# Allegro board SAFEBOX.brd
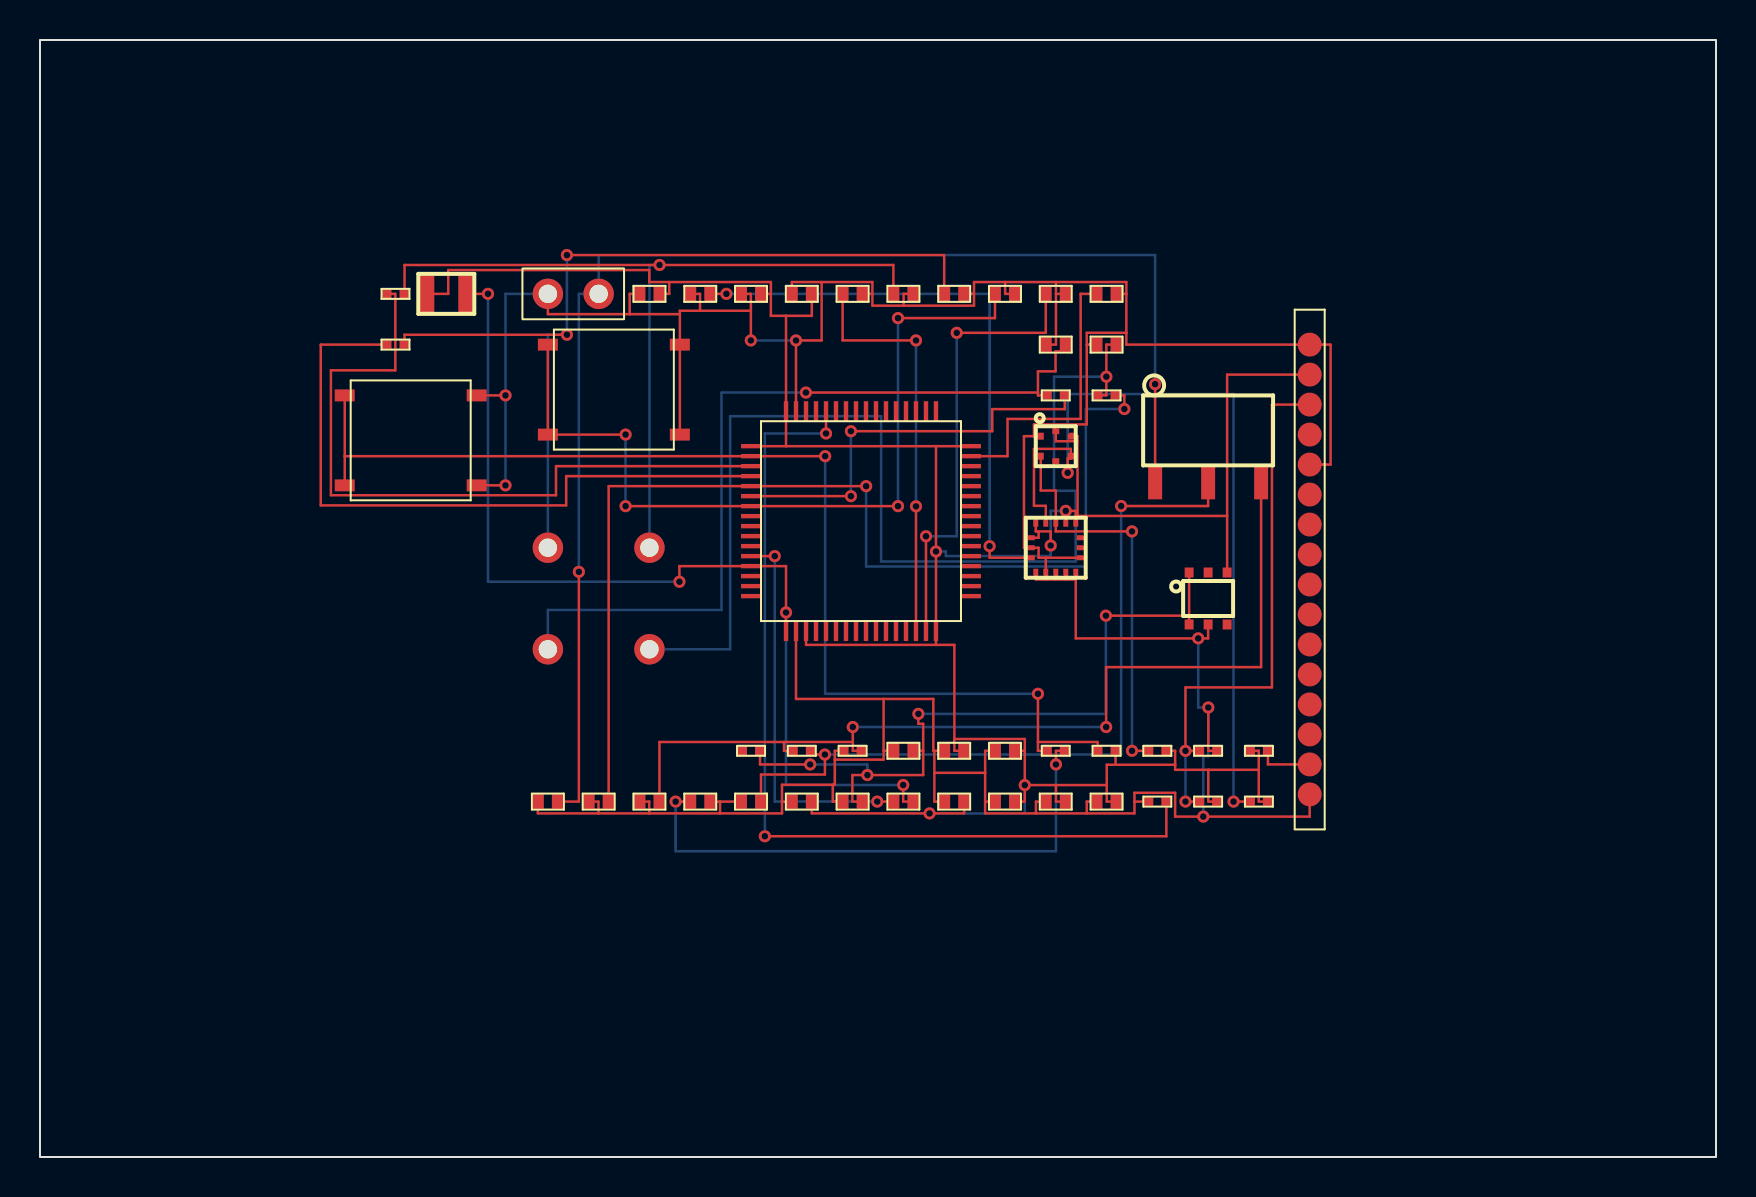
[diagram p0: board, top side]
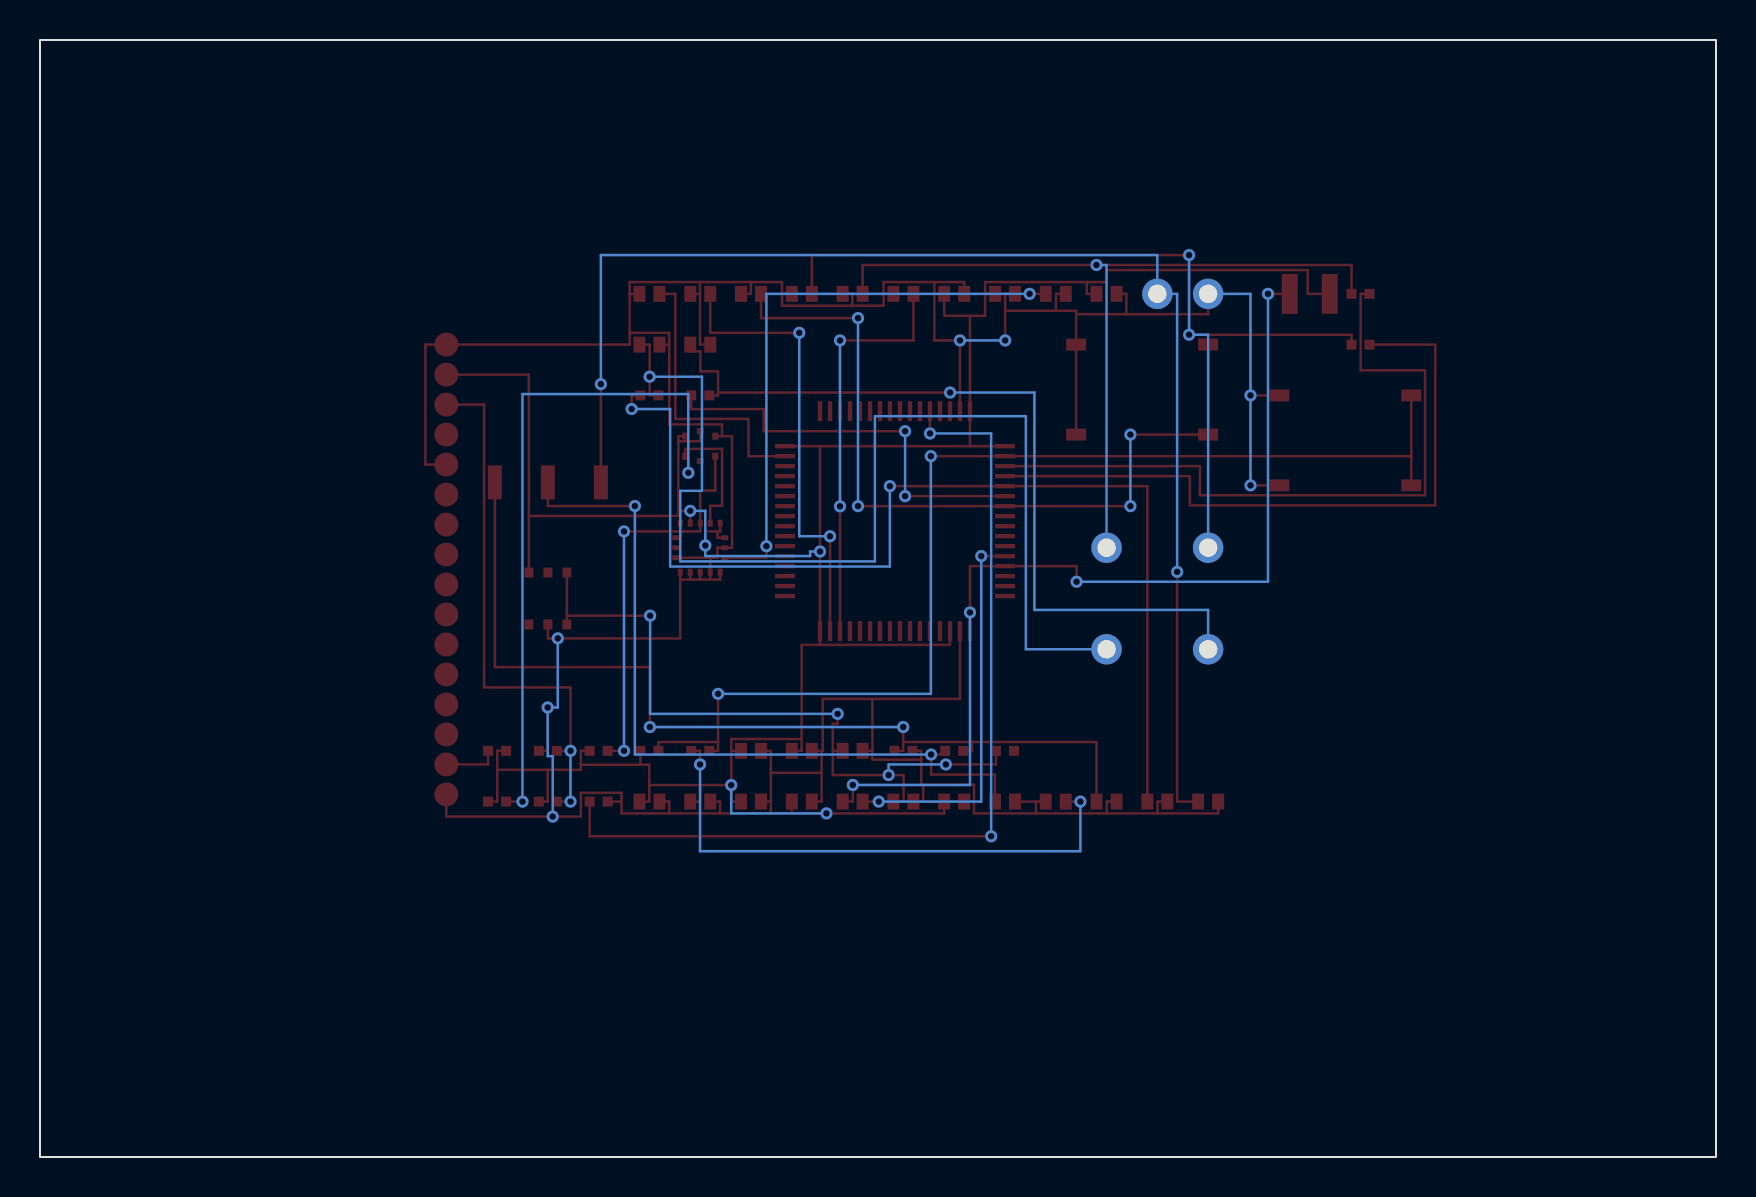
[diagram p1: board, bottom side, seen from below]

Outline 83.82 x 55.88 mm; copper layers: TOP, BOTTOM. Coordinates in mm from the lower left corner of the outline.
Outline path: rectangle 0,0 83.82,55.88

## Placement (name value [footprint] x y rotation side)
C1  100nF  [CAPACITOR]  30.48 43.18 0 top
C2  10nF  [CAPACITOR]  33.02 43.18 0 top
C3  10uF  [CAPACITOR]  35.56 43.18 0 top
C4  100nF  [CAPACITOR]  38.1 43.18 0 top
C5  4.7uF  [CAPACITOR]  40.64 43.18 0 top
C6  4.3pF  [CAPACITOR]  43.18 43.18 0 top
C7  4.3pF  [CAPACITOR]  45.72 43.18 0 top
C8  100nF  [CAPACITOR]  48.26 43.18 0 top
C9  2.2uF  [CAPACITOR]  50.8 43.18 0 top
C10  2.2uF  [CAPACITOR]  53.34 43.18 0 top
C11  20pF  [CAPACITOR]  50.8 40.64 0 top
C12  20pF  [CAPACITOR]  53.34 40.64 0 top
C13  100nF  [CAPACITOR]  53.34 17.78 0 top
C14  100nF  [CAPACITOR]  50.8 17.78 0 top
C15  100nF  [CAPACITOR]  48.26 17.78 0 top
C16  100nF  [CAPACITOR]  45.72 17.78 0 top
C17  100nF  [CAPACITOR]  43.18 17.78 0 top
C18  1uF_X5R_0603  [CAPACITOR]  38.1 17.78 0 top
C19  100nF  [CAPACITOR]  33.02 17.78 0 top
C20  20pF  [CAPACITOR]  27.94 17.78 0 top
C21  10uF  [CAPACITOR]  25.4 17.78 0 top
C22  10uF  [CAPACITOR]  30.48 17.78 0 top
C23  10uF  [CAPACITOR]  35.56 17.78 0 top
C24  1uF  [CAPACITOR]  40.64 17.78 0 top
C25  100nF  [CAPACITOR]  43.18 20.32 0 top
C26  1uF  [CAPACITOR]  45.72 20.32 0 top
C27  100nF  [CAPACITOR]  48.26 20.32 0 top
J1  BATTERIES  [JUMPER2]  25.4 43.18 0 top
L1  10uH  [INDUCTOR]  20.32 43.18 0 top
R1  1k  [RESISTANCE]  17.78 43.18 0 top
R2  1k  [RESISTANCE]  17.78 40.64 0 top
R3  10k  [RESISTANCE]  55.88 17.78 0 top
R4  1k  [RESISTANCE]  50.8 38.1 0 top
R5  1k  [RESISTANCE]  53.34 38.1 0 top
R6  4.7K  [RESISTANCE]  53.34 20.32 0 top
R7  100  [RESISTANCE]  50.8 20.32 0 top
R8  1k  [RESISTANCE]  55.88 20.32 0 top
R9  1k  [RESISTANCE]  60.96 17.78 0 top
R10  1k  [RESISTANCE]  58.42 17.78 0 top
R11  1k  [RESISTANCE]  58.42 20.32 0 top
R12  330  [RESISTANCE]  60.96 20.32 0 top
R13  2k  [RESISTANCE]  40.64 20.32 0 top
R14  120  [RESISTANCE]  38.1 20.32 0 top
R15  1k  [RESISTANCE]  35.56 20.32 0 top
SW1  USER(Blue)  [SFSWITCH]  15.24 38.1 0 top
SW2  TD-0341[RESET/Black]  [SFSWITCH]  25.4 40.64 0 top
U1  MUC_LQFP64  [LQFP64]  35.56 35.56 0 top
U2  -  [HTS221]  50.8 35.56 0 top
U3  -  [LSM6DS0]  50.8 30.48 0 top
U4  -  [WH1602B2]  63.5 40.64 0 top
U5  -  [LD1117S50TR]  58.42 38.1 0 top
U6  LD39050PU33R  [LD39059PU33R]  58.42 27.94 0 top
Y1  ABS25-32.768-6-T  [CRYS11MHZ]  25.4 30.48 0 top
Y2  8MHZ(16pF)  [CRYS11MHZ]  25.4 25.4 0 top

## Library data of the parts
C1-C27 = C
J1 = CON2: User Part Number: ***
L1 = L
R1-R15 = R
SW1 SW2 = SW PUSHBUTTON-DPST
U1 = MCU_LQFP64
U2 = HTS221
U3 = LSM6DS0
U4 = WH1602B2
U5 = LD1117S50TR
U6 = LD39050PU33R
Y1 Y2 = CRYSTAL: Tolerance: ***; User Part Number: ***

## Footprints (pads in the part's own frame, mm; a bottom-side part is the same pattern mirrored in y, then rotated)
CAPACITOR
  rect 0.6x0.8 smd: 1(-0.5,0) 2(0.5,0)
CRYS11MHZ
  round 1.524 hole 0.914: 1(0,0) 2(5.08,0)
HTS221
  custom 0.3x0.35 smd: 1(0.75,0.5)
  rect 0.3x0.35 smd: 2(0.75,-0.5) 4(-0.75,-0.5) 5(-0.75,0.5)
  rect 0.35x0.3 smd: 3(0,-0.75) 6(0,0.75)
INDUCTOR
  rect 0.8x2 smd: 1(-1,0) 2(1,0)
JUMPER2
  round 1.524 hole 0.914: 1(0,0) 2(2.54,0)
LD1117S50TR
  rect 0.7x1.7 smd: 1(-2.65,-4.35) 2(0,-4.35) 3(2.65,-4.35)
LD39059PU33R
  rect 0.45x0.5 smd: 1(-0.95,-1.3) 2(0,-1.3) 3(0.95,-1.3) 4(0.95,1.3) 5(0,1.3) 6(-0.95,1.3)
LQFP64
  rect 1x0.22 smd: 1(0,0) 2(0,-0.5) 3(0,-1) 4(0,-1.5) 5(0,-2) 6(0,-2.5) 7(0,-3) 8(0,-3.5) 9(0,-4) 10(0,-4.5) 11(0,-5) 12(0,-5.5) 13(0,-6) 14(0,-6.5) 15(0,-7) 16(0,-7.5) 33(11,-7.5) 34(11,-7) 35(11,-6.5) 36(11,-6) 37(11,-5.5) 38(11,-5) 39(11,-4.5) 40(11,-4) 41(11,-3.5) 42(11,-3) 43(11,-2.5) 44(11,-2) 45(11,-1.5) 46(11,-1) 47(11,-0.5) 48(11,0)
  rect 0.22x1 smd: 17(1.75,-9.25) 18(2.25,-9.25) 19(2.75,-9.25) 20(3.25,-9.25) 21(3.75,-9.25) 22(4.25,-9.25) 23(4.75,-9.25) 24(5.25,-9.25) 25(5.75,-9.25) 26(6.25,-9.25) 27(6.75,-9.25) 28(7.25,-9.25) 29(7.75,-9.25) 30(8.25,-9.25) 31(8.75,-9.25) 32(9.25,-9.25) 49(9.25,1.75) 50(8.75,1.75) 51(8.25,1.75) 52(7.75,1.75) 53(7.25,1.75) 54(6.75,1.75) 55(6.25,1.75) 56(5.75,1.75) 57(5.25,1.75) 58(4.75,1.75) 59(4.25,1.75) 60(3.75,1.75) 61(3.25,1.75) 62(2.75,1.75) 63(2.25,1.75) 64(1.75,1.75)
LSM6DS0
  rect 0.25x0.35 smd: 1(-1,1.225) 2(-0.5,1.225) 3(0,1.225) 4(0.5,1.225) 5(1,1.225) 9(1,-1.225) 10(0.5,-1.225) 11(0,-1.225) 12(-0.5,-1.225) 13(-1,-1.225)
  rect 0.35x0.25 smd: 6(1.225,0.5) 7(1.225,0) 8(1.225,-0.5) 14(-1.225,-0.5) 15(-1.225,0) 16(-1.225,0.5)
RESISTANCE
  rect 0.5x0.5 smd: 1(-0.45,0) 2(0.45,0)
SFSWITCH
  rect 1x0.6 smd: 1(0,0) 2(0,-4.5) 3(6.6,-4.5) 4(6.6,0)
WH1602B2
  round 1.2 smd: 1(0,0) 2(0,-1.5) 3(0,-3) 4(0,-4.5) 5(0,-6) 6(0,-7.5) 7(0,-9) 8(0,-10.5) 9(0,-12) 10(0,-13.5) 11(0,-15) 12(0,-16.5) 13(0,-18) 14(0,-19.5) 15(0,-21) 16(0,-22.5)

## Nets
3.3V: C1.2 C3.2 C4.2 C13.2 C14.2 C15.2 C16.2 C18.2 C26.2 C27.2 L1.1 R6.2 R8.2 R9.2 R10.2 R12.1 U1.1(VBAT/VLCD) U1.19(VDD/PF5) U1.32(VDD) U1.48(VDD/VUSB/VSA/PF7) U1.64(VDD2) U2.1(VDD) U2.6(CS) U3.1(VDD_IO) U3.4(SDO/SA0) U3.5(CS) U3.16(VDD) U4.2(VDD) U6.4(VO)
AVDD: C17.2 L1.2 U1.13(VDDA/VREF+) U1.17(PA3/SAR_VREF+)
GND_FIELD SIGNAL: C17.1 U1.12(VSSA)
VIN: C21.2 J1.2 U5.1(VIN)
0: C1.1 C2.1 C3.1 C4.1 C5.2 C6.2 C7.2 C8.2 C9.2 C10.2 C11.1 C12.1 C13.1 C14.1 C15.1 C16.1 C18.1 C19.2 C20.1 C21.1 C22.1 C23.1 C24.1 C25.1 C26.1 C27.1 J1.1 R3.1 R11.2 R13.1 SW1.3 SW1.4 SW2.3 SW2.4 U1.18(VSS/PF4/PA3) U1.63(VSS) U2.5(GND) U3.8(RES5) U3.9(RES3) U3.10(RES2) U3.11(RES1) U3.12(GND2) U3.13(GND1) U3.15(RES6) U4.1(VSS) U4.5(R/W) U4.16(K) U6.2(GND)
HTS221_DRDY: U1.29(PB10/PE8)
HTS221_DRDY_614: U2.3(DRDY)
I2C_SCL: U1.61(PB8)
I2C_SCL_614: R9.1 U2.2(SCL) U3.2(SCL/SPC)
I2C_SDA: U1.62(PB9)
I2C_SDA_614: R8.1 U2.4(SDA) U3.3(SDA/SDI/SDO)
LCD_DB0: U4.7(DB0)
LCD_DB1: U4.8(DB1)
LCD_DB2: U4.9(DB2)
LCD_DB3: U4.10(DB3)
LCD_DB4: U1.58(PB6)
LCD_DB4_16243: U4.11(DB4)
LCD_DB5: U1.38(PC7)
LCD_DB5_16243: U4.12(DB5)
LCD_DB6: U1.41(PA8)
LCD_DB6_16243: U4.13(DB6)
LCD_DB7: U1.42(PA9)
LCD_DB7_16243: U4.14(DB7)
LCD_EN: U1.23(PA7)
LCD_EN_16243: U4.6(E)
LCD_RS: U1.22(PA6)
LCD_RS_16243: U4.4(RS)
LSM6DS0_INT1: U1.57(PB5)
LSM6DS0_INT1_911: U3.7(INT)
N01290: C2.2 U3.14(CAP)
N02359: C5.1 U1.30(PB11/VCAP1)
N02461: C6.1 R1.2 Y1.2
N02585: C7.1 R2.2 Y1.1
N02649: R2.1 U1.4(PC15-OSC32_OUT)
N03513: R1.1 U1.3(PC14-OSC32_IN)
N03642: C8.1 SW2.1 SW2.2 U1.7(NRST)
N03646: R3.2 U1.60(BOOT0)
N03947: C9.1 U1.31(VSS/VCAP1)
N04064: C10.1 U1.47(VSS/VCP2/PF6)
N04106: C20.2 R5.2 U1.5(PF0/PD0/PH0-OSC_IN)
N04228: R4.2 U1.6(PF1/PD1/PH1-OSC_OUT)
N04232: C11.2 R4.1 Y2.1
N04333: C12.2 R5.1 Y2.2
N10664: R6.1 R7.1 SW1.1 SW1.2 U1.2(PC13)
N11223: C19.1 R7.2
N18449: R10.1 R11.1 U4.3(VO)
N20333: C22.2 R13.2 R14.1 U5.3(ADJ)
N20432: C23.2 R14.2 U5.2(VOUT)
N20778: C24.2 C25.2 R15.2 U6.1(EN) U6.6(VI)
N206601: R15.1
N1624314: R12.2 U4.15(A)

Pads without a net: U1 8 9 10 11 14 15 16 20 21 24 25 26 27 28 33 34 35 36 37 39 40 43 44 45 46 49 50 51 52 53 54 55 56 59; U3 6; U6 3 5

## Via types
v1: diameter 0.61, hole 0.33, TOP to BOTTOM, 59 vias

## Routing (per net, layer and track width the routed paths; a pad name or vN(x,y) marks a point on that pad's centre or on a via; arc(x,y) is an arc through that point)
3.3V: length 153.1
  TOP w0.127: 53.79,19.63 56.77,19.63 ; 53.79,19.63 53.35,19.63 53.35,18.61 ; 53.79,19.63 R6.2 ; 56.77,19.63 56.77,19.37 58.43,19.37 ; 56.77,19.63 56.77,20.32 R8.2 ; 37.31,42.08 38.6,42.08 C4.2 ; 37.31,42.08 36.55,42.08 36.55,43.18 ; 37.31,42.08 U1.64 37.31,35.56 ; v1(49.25,18.61) 49.25,17.78 C15.2 ; v1(49.25,18.61) 50.81,18.61 ; v1(49.25,18.61) 49.25,20.32 ; 31.47,43.77 36.55,43.77 36.55,43.18 ; 31.47,43.77 30.47,43.77 30.47,44.37 20.42,44.37 20.42,43.18 L1.1 ; 31.47,43.77 31.47,43.18 C1.2 ; 51.89,35.81 51.89,32.07 ; 51.89,35.81 50.8,35.81 U2.6 ; 51.89,35.81 51.89,36.06 U2.1 ; 51.89,32.07 51.8,32.07 ; 51.89,32.07 59.37,32.07 ; 44.81,25.62 U1.32 v1(44.81,30.29) 44.81,35.56 ; 44.81,25.62 45.73,25.62 45.73,20.91 ; 44.81,25.62 38.31,25.62 U1.19 ; 53.35,18.61 50.81,18.61 ; 53.35,18.61 53.35,17.78 C13.2 ; C18.2 38.6,17.19 v1(44.49,17.19) 46.22,17.19 C16.2 ; 45.73,20.91 49.25,20.91 49.25,20.32 ; 45.73,20.91 45.73,20.32 C26.2 ; 58.43,19.37 60.95,19.37 ; 58.43,19.37 58.43,17.78 R10.2 ; 50.81,18.61 50.81,17.78 C14.2 ; 36.55,43.18 C3.2 ; R12.1 60.95,20.32 60.95,19.37 ; 44.81,35.56 37.31,35.56 ; 44.81,35.56 U1.48 ; v1(50.55,30.59) 50.55,31.3 49.94,31.3 ; 51.8,32.07 51.8,32.32 v1(51.3,32.32) U3.4 ; 51.8,32.07 U3.5 ; 37.31,35.56 U1.1 ; R9.2 60.95,17.78 60.95,19.37 ; 49.94,31.3 49.94,30.98 U3.16 ; 49.94,31.3 49.8,31.3 U3.1 ; 59.37,32.07 U6.4 ; 59.37,32.07 59.37,39.14 U4.2 ; 49.25,20.32 C27.2
  BOTTOM w0.127: v1(44.49,17.19) 49.25,17.19 v1(49.25,18.61) ; v1(44.81,30.29) 45.31,30.29 45.31,30.06 50.55,30.06 v1(50.55,30.59) 50.55,32.32 v1(51.3,32.32)
AVDD: length 50.3
  TOP w0.127: v1(43.17,18.61) 43.17,17.78 C17.2 ; v1(31.98,28.78) 31.98,29.56 U1.13 37.31,29.56 v1(37.31,27.24) U1.17 ; L1.2 v1(22.41,43.18)
  BOTTOM w0.127: v1(31.98,28.78) 22.41,28.78 v1(22.41,43.18) ; v1(43.17,18.61) 37.31,18.61 v1(37.31,27.24)
GND_FIELD SIGNAL: length 19.4
  TOP w0.127: U1.12 v1(36.75,30.06) ; C17.1 v1(41.87,17.78)
  BOTTOM w0.127: v1(36.75,30.06) 36.75,17.78 v1(41.87,17.78)
VIN: length 68.6
  TOP w0.127: U5.1 v1(55.77,38.66) ; C21.2 26.95,17.78 v1(26.95,29.27)
  BOTTOM w0.127: v1(55.77,38.66) 55.77,45.12 27.94,45.12 J1.2 26.95,43.18 v1(26.95,29.27)
0: length 219.1
  TOP w0.127: 51.3,28.89 51.8,28.89 ; 51.3,28.89 U3.10 ; 51.3,28.89 50.8,28.89 ; 51.8,28.89 51.8,25.95 v1(57.92,25.95) 58.42,25.95 U6.2 ; 51.8,28.89 U3.9 ; 54.74,17.78 54.74,17.19 52.35,17.19 ; 54.74,17.78 54.74,18.22 56.77,18.22 56.77,17.03 v1(58.18,17.03) 63.5,17.03 U4.16 ; 54.74,17.78 R3.1 ; C8.2 48.27,43.18 48.27,43.77 ; 52.35,17.19 49.81,17.19 ; 52.35,17.19 52.35,17.78 C13.1 ; 49.81,17.19 47.27,17.19 47.27,17.78 ; 49.81,17.19 49.81,17.78 C14.1 ; C20.1 27.93,17.78 27.93,17.19 ; 39.65,18.62 37.11,18.62 37.11,17.78 ; 39.65,18.62 39.75,18.62 39.75,19.88 ; 39.65,18.62 39.65,17.78 C24.1 ; 44.73,19.22 47.27,19.22 ; 44.73,19.22 44.73,20.32 ; 44.73,19.22 44.73,17.78 C16.1 ; 47.27,19.22 47.27,20.32 C27.1 ; 47.27,19.22 47.27,17.78 ; 29.49,42.16 29.49,43.18 C1.1 ; 29.49,42.16 25.4,42.16 J1.1 ; 29.49,42.16 32,42.16 ; C25.1 42.19,20.32 ; 42.19,20.32 42.19,22.92 ; 42.19,20.32 42.19,19.88 39.75,19.88 ; C6.2 43.19,43.18 43.19,42.59 ; 32,42.16 32,42.34 33.01,42.34 ; 32,42.16 SW2.4 SW2.3 ; 50.81,43.18 50.81,40.64 C11.1 ; 50.81,43.18 C9.2 ; 50.81,43.18 50.81,43.77 ; C12.1 52.35,40.64 ; 52.35,40.64 52.35,36.65 49.71,36.65 49.71,36.06 ; 52.35,40.64 52.35,41.23 54.33,41.23 ; 46.71,43.18 46.71,42.59 43.19,42.59 ; 46.71,43.18 46.71,43.77 48.27,43.77 ; 46.71,43.18 C7.2 ; 47.27,17.78 C15.1 ; C19.2 34.01,17.78 ; 34.01,17.78 34.01,17.19 ; 34.01,17.78 C23.1 ; 50.3,28.89 U3.12 50.3,29.98 ; 50.3,28.89 49.8,28.89 U3.13 ; 50.3,28.89 50.8,28.89 ; 43.19,42.59 41.63,42.59 41.63,43.18 ; 42.19,22.92 37.81,22.92 U1.18 ; 42.19,22.92 44.68,22.92 44.68,20.32 44.73,20.32 ; 27.93,17.19 24.9,17.19 C21.1 ; 27.93,17.19 30.47,17.19 ; 50.3,29.98 U3.8 ; 50.3,29.98 49.94,29.98 49.94,30.48 U3.15 49.21,30.48 49.21,36.06 49.71,36.06 ; R13.1 39.75,20.32 39.75,19.88 ; 54.33,41.23 54.33,40.64 U4.1 64.54,40.64 64.54,34.64 U4.5 ; 54.33,41.23 54.33,43.18 ; 54.33,43.18 C10.2 ; 54.33,43.18 54.33,43.77 50.81,43.77 ; 34.01,17.19 37.11,17.19 37.11,17.78 ; 34.01,17.19 30.47,17.19 ; 39.09,43.77 39.09,40.85 v1(37.81,40.85) U1.63 ; 39.09,43.77 41.63,43.77 41.63,43.18 ; 39.09,43.77 37.6,43.77 C4.1 ; 48.27,43.77 50.81,43.77 ; 41.63,43.18 C5.2 ; 49.71,36.06 U2.5 ; 50.8,28.89 U3.11 ; 44.73,20.32 C26.1 ; 33.01,42.34 33.01,43.18 C2.1 ; 33.01,42.34 35.55,42.34 ; 30.47,17.19 30.47,17.78 C22.1 ; 37.11,17.78 C18.1 ; v1(58.43,22.49) 58.43,20.32 R11.2 ; 35.55,42.34 35.55,43.18 C3.1 ; 35.55,42.34 v1(35.55,40.85) ; SW1.3 v1(23.28,33.6) ; SW1.4 v1(23.28,38.1)
  BOTTOM w0.127: v1(23.28,33.6) v1(23.28,38.1) 23.28,43.18 J1.1 ; v1(37.81,40.85) v1(35.55,40.85) ; v1(57.92,25.95) 57.92,22.49 v1(58.43,22.49) 58.43,20.05 58.18,20.05 v1(58.18,17.03)
I2C_SCL_614: length 40.9
  TOP w0.127: U3.2 50.3,32.58 49.71,32.58 49.71,35.43 51.55,35.43 U2.2 51.55,34.95 51.4,34.95 v1(51.4,34.23) ; R9.1 v1(59.69,17.78)
  BOTTOM w0.127: v1(51.4,34.23) 51.4,38.17 59.69,38.17 v1(59.69,17.78)
I2C_SDA_614: length 20.1
  TOP w0.127: v1(54.61,31.3) 50.8,31.3 U3.3 50.8,33.34 50.05,33.34 U2.4 ; R8.1 v1(54.61,20.32)
  BOTTOM w0.127: v1(54.61,20.32) v1(54.61,31.3)
N01290: length 29.3
  TOP w0.127: C2.2 v1(34.33,43.18) ; U3.14 47.49,29.98 v1(47.49,30.56)
  BOTTOM w0.127: v1(34.33,43.18) 47.49,43.18 v1(47.49,30.56)
N02359: length 20.5
  TOP w0.127: v1(43.81,40.85) 40.14,40.85 C5.1 ; U1.30 v1(43.81,32.55)
  BOTTOM w0.127: v1(43.81,32.55) v1(43.81,40.85)
N02461: length 42
  TOP w0.127: R1.2 18.23,44.62 v1(30.98,44.62) 42.68,44.62 C6.1
  BOTTOM w0.127: v1(30.98,44.62) 30.48,44.62 Y1.2
N02585: length 45
  TOP w0.127: C7.1 45.22,45.12 v1(26.35,45.12) ; R2.2 18.23,41.14 v1(26.35,41.14)
  BOTTOM w0.127: Y1.1 25.4,41.14 v1(26.35,41.14) v1(26.35,45.12)
N02649: length 34.3
  TOP w0.127: R2.1 14.04,40.64 14.04,32.6 26.32,32.6 26.32,34.06 U1.4
N03513: length 36.2
  TOP w0.127: U1.3 25.81,34.56 25.81,33.1 14.55,33.1 14.55,39.35 17.77,39.35 17.77,43.18 R1.1
N03642: length 41.1
  TOP w0.127: v1(42.91,41.97) 47.76,41.97 C8.1 ; v1(29.29,32.56) U1.7 v1(42.91,32.56) ; SW2.1 SW2.2 v1(29.29,36.14)
  BOTTOM w0.127: v1(29.29,36.14) v1(29.29,32.56) ; v1(42.91,41.97) v1(42.91,32.56)
N03646: length 46.1
  TOP w0.127: R3.2 56.33,16.05 v1(36.25,16.05) ; U1.60 v1(39.31,36.19)
  BOTTOM w0.127: v1(36.25,16.05) 36.25,36.19 v1(39.31,36.19)
N03947: length 22.9
  TOP w0.127: C9.1 50.3,41.23 v1(45.85,41.23) ; U1.31 v1(44.31,31.05)
  BOTTOM w0.127: v1(45.85,41.23) 45.85,31.05 v1(44.31,31.05)
N04064: length 14.4
  TOP w0.127: C10.1 52.04,43.18 52.04,36.92 48.39,36.92 48.39,35.06 U1.47
N04106: length 54.6
  TOP w0.127: R5.2 54.23,38.1 v1(54.23,37.42) ; C20.2 28.44,33.56 U1.5 v1(41.32,33.56)
  BOTTOM w0.127: v1(54.23,37.42) 52.3,37.42 52.3,29.54 41.32,29.54 v1(41.32,33.56)
N04228: length 20.7
  TOP w0.127: U1.6 v1(40.55,33.06) ; R4.2 51.25,37.41 47.62,37.41 47.62,36.31 v1(40.55,36.31)
  BOTTOM w0.127: v1(40.55,33.06) v1(40.55,36.31)
N04232: length 41.7
  TOP w0.127: R4.1 49.91,38.1 49.91,38.24 ; C11.2 51.3,40.3 50.79,40.3 50.79,39.3 49.91,39.3 49.91,38.24 ; 49.91,38.24 v1(38.31,38.24)
  BOTTOM w0.127: Y2.1 25.4,27.37 34.09,27.37 34.09,38.24 v1(38.31,38.24)
N04333: length 56.7
  TOP w0.127: R5.1 53.33,38.1 v1(53.33,39.04) 53.33,40.64 C12.2
  BOTTOM w0.127: Y2.2 34.52,25.4 34.52,37.06 42.07,37.06 42.07,29.79 51.8,29.79 51.8,33.33 50.71,33.33 50.71,39.04 v1(53.33,39.04)
N10664: length 57.8
  TOP w0.127: 49.91,20.76 49.91,20.32 R7.1 ; 49.91,20.76 v1(49.91,23.17) ; 49.91,20.76 52.89,20.76 R6.1 ; SW1.2 15.24,35.06 ; 15.24,35.06 SW1.1 ; 15.24,35.06 U1.2 v1(39.27,35.06)
  BOTTOM w0.127: v1(49.91,23.17) 39.27,23.17 v1(39.27,35.06)
N11223: length 27.7
  TOP w0.127: v1(50.81,19.64) 50.81,20.32 R7.2 ; C19.1 v1(31.79,17.78)
  BOTTOM w0.127: v1(31.79,17.78) 31.79,15.3 50.81,15.3 v1(50.81,19.64)
N18449: length 27.4
  TOP w0.127: R11.1 v1(57.29,20.32) 57.29,23.49 61.61,23.49 61.61,37.64 U4.3 ; R10.1 v1(57.29,17.78)
  BOTTOM w0.127: v1(57.29,17.78) v1(57.29,20.32)
N20333: length 47.8
  TOP w0.127: v1(40.65,21.51) 40.65,20.76 ; 40.65,20.76 37.21,20.76 ; 40.65,20.76 40.65,20.32 R13.2 ; R14.1 37.21,20.32 37.21,20.76 ; 37.21,20.76 30.98,20.76 C22.2 ; v1(53.32,21.51) 53.32,24.51 61.07,24.51 U5.3
  BOTTOM w0.127: v1(40.65,21.51) v1(53.32,21.51)
N20432: length 39.2
  TOP w0.127: R14.2 38.55,20.13 v1(39.25,20.13) 39.25,19.13 36.06,19.13 C23.2 ; v1(54.07,32.57) 58.42,32.57 U5.2
  BOTTOM w0.127: v1(54.07,32.57) 54.07,20.13 v1(39.25,20.13)
N20778: length 36.8
  TOP w0.127: U6.1 57.47,27.08 ; 57.47,27.08 v1(53.31,27.08) ; 57.47,27.08 U6.6 ; R15.2 36.01,19.64 v1(38.52,19.64) ; 44.17,20.32 44.17,21.67 43.93,21.67 v1(43.93,22.17) ; 44.17,20.32 C25.2 ; 44.17,20.32 44.17,19.11 v1(41.38,19.11) 40.63,19.11 40.63,17.78 C24.2
  BOTTOM w0.127: v1(53.31,27.08) 53.31,22.17 v1(43.93,22.17) ; v1(38.52,19.64) 41.38,19.64 v1(41.38,19.11)
N1624314: length 2.8
  TOP w0.127: U4.15 61.41,19.64 R12.2
